# Altium PCB SPECCY2010.PcbDoc (part 1 of 2)
Units mil, origin at the board's own origin, x right, y up, seen from the top; angles counter-clockwise.
Board outline 6692.91 x 4724.41 mil, 2 copper layers (Top Layer, Bottom Layer); 70 components, 123 nets, 541 pads, 228 vias.
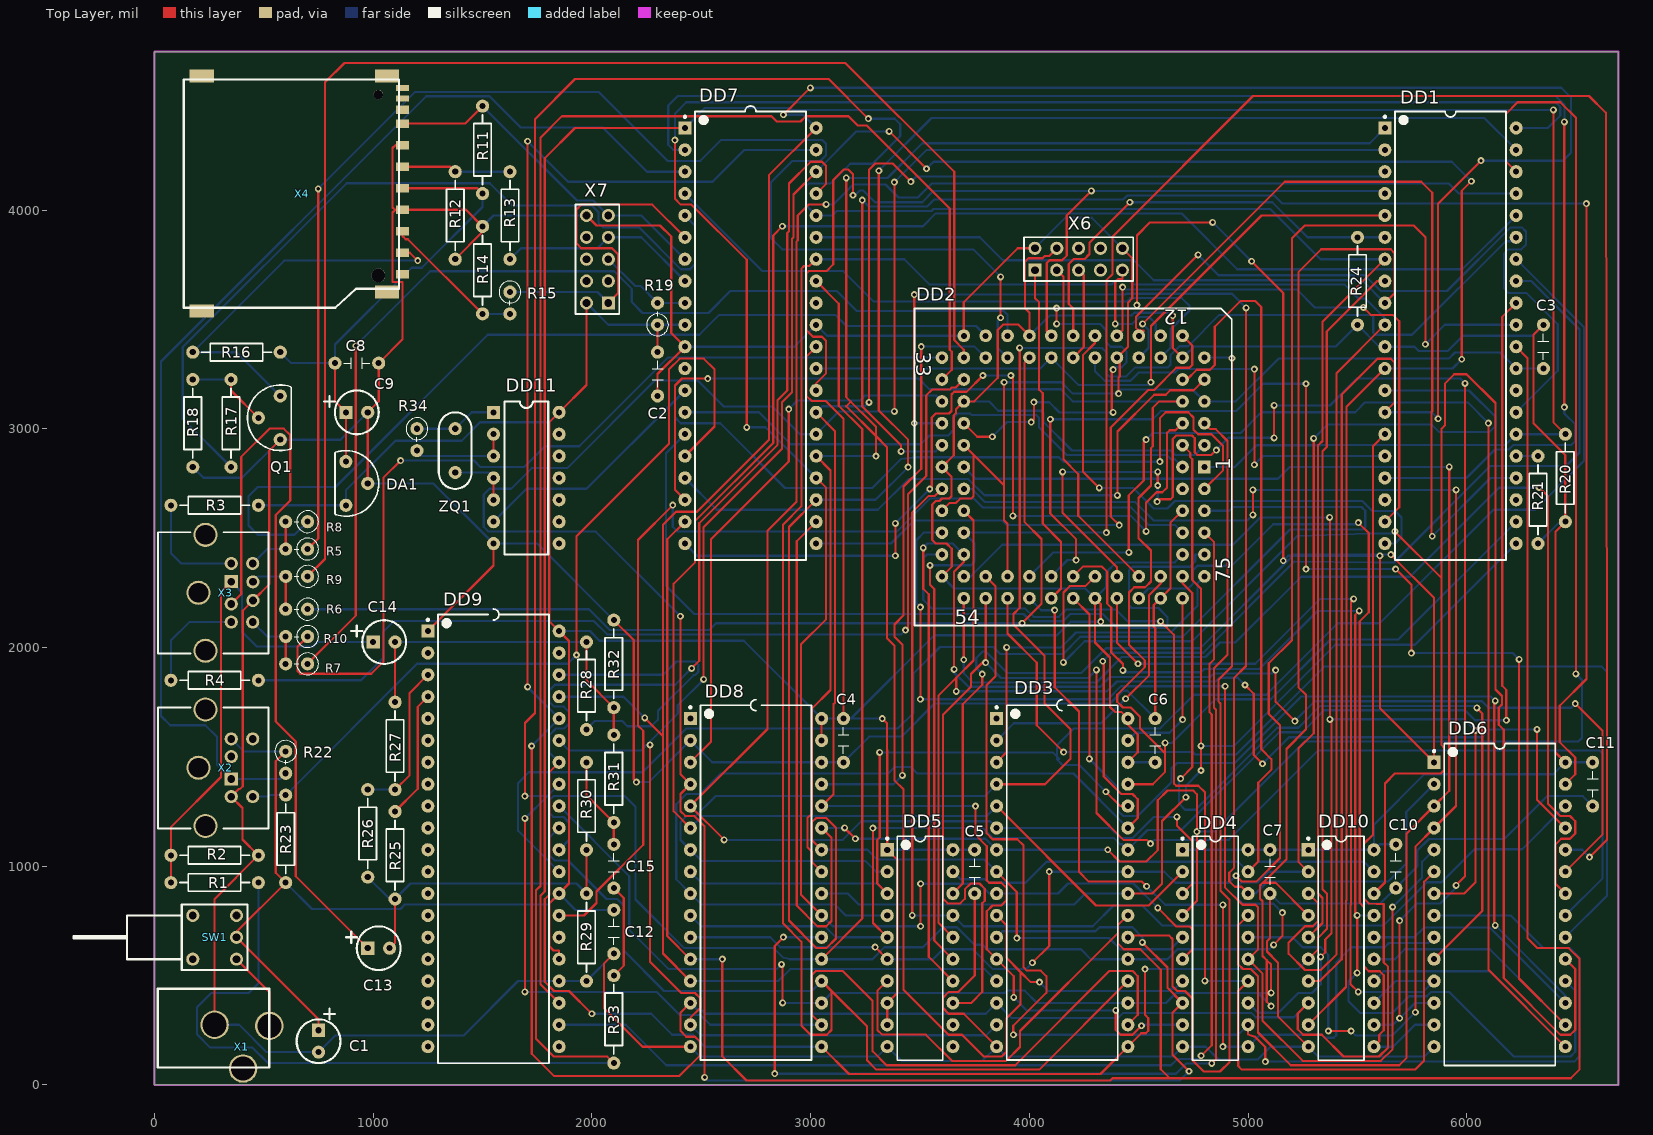
[diagram p0: Top Layer view]
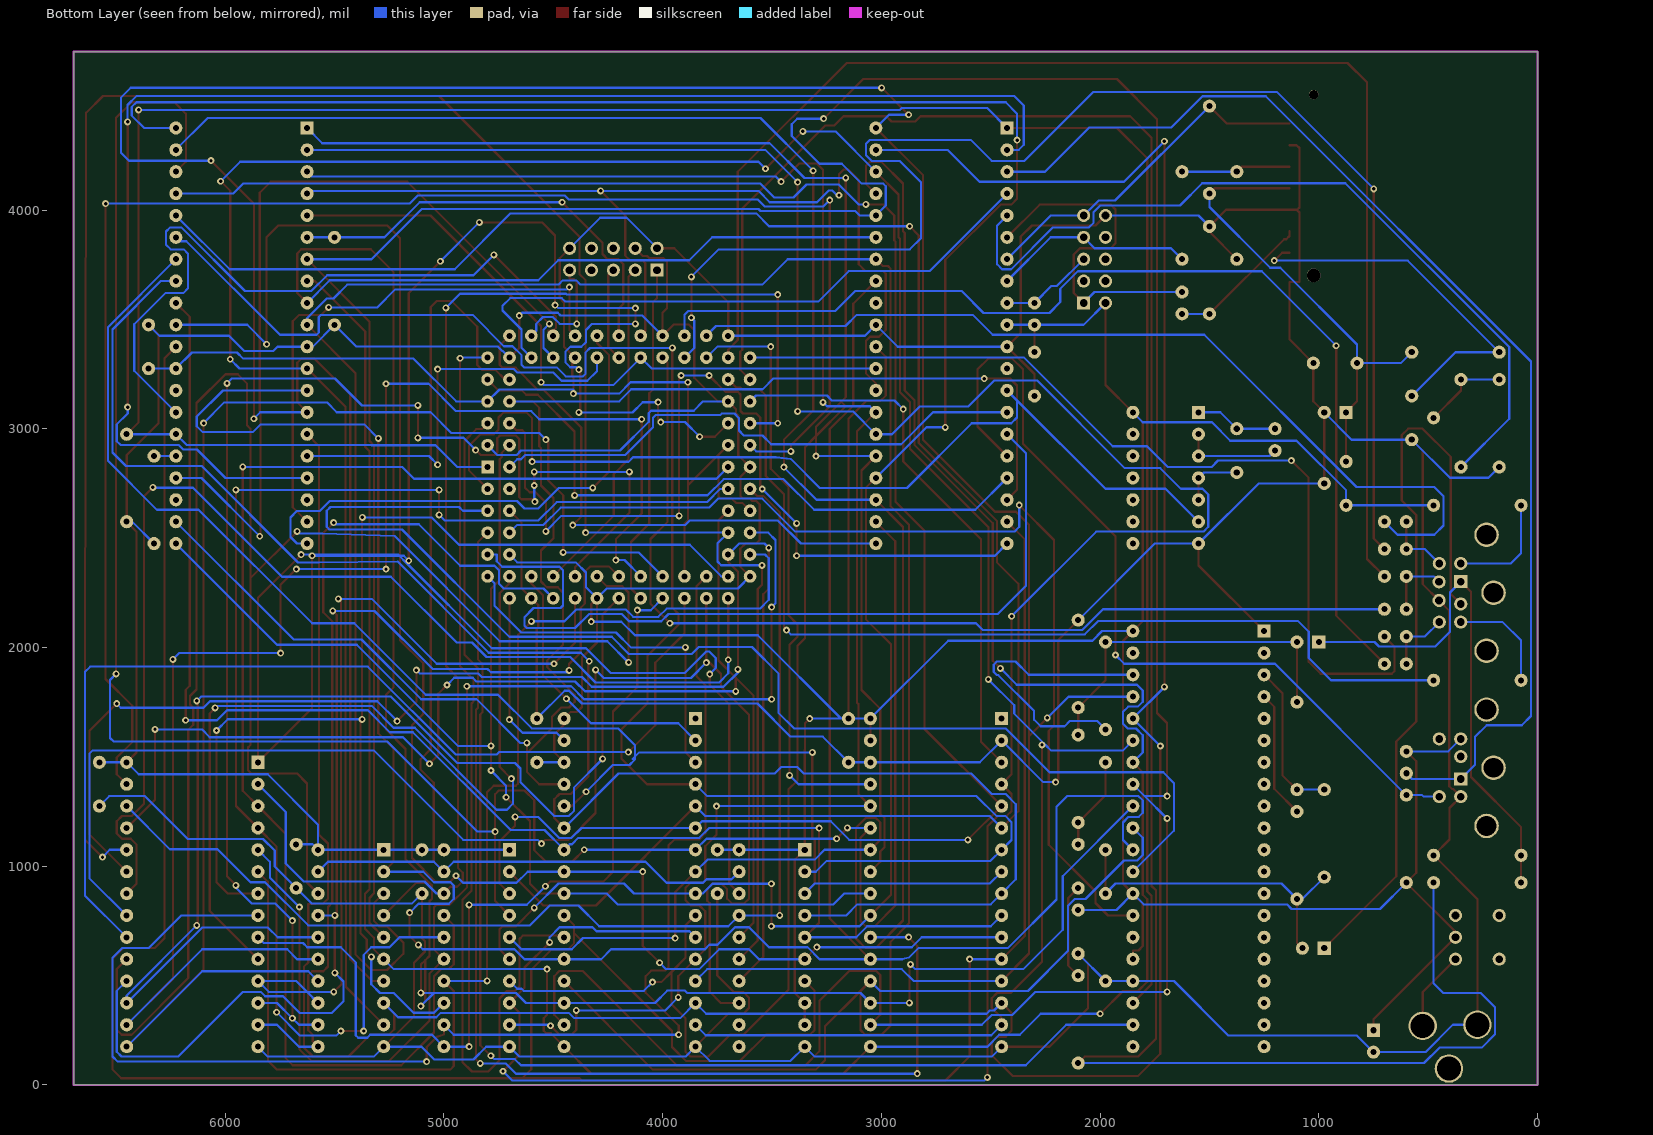
[diagram p1: Bottom Layer view, seen from below]
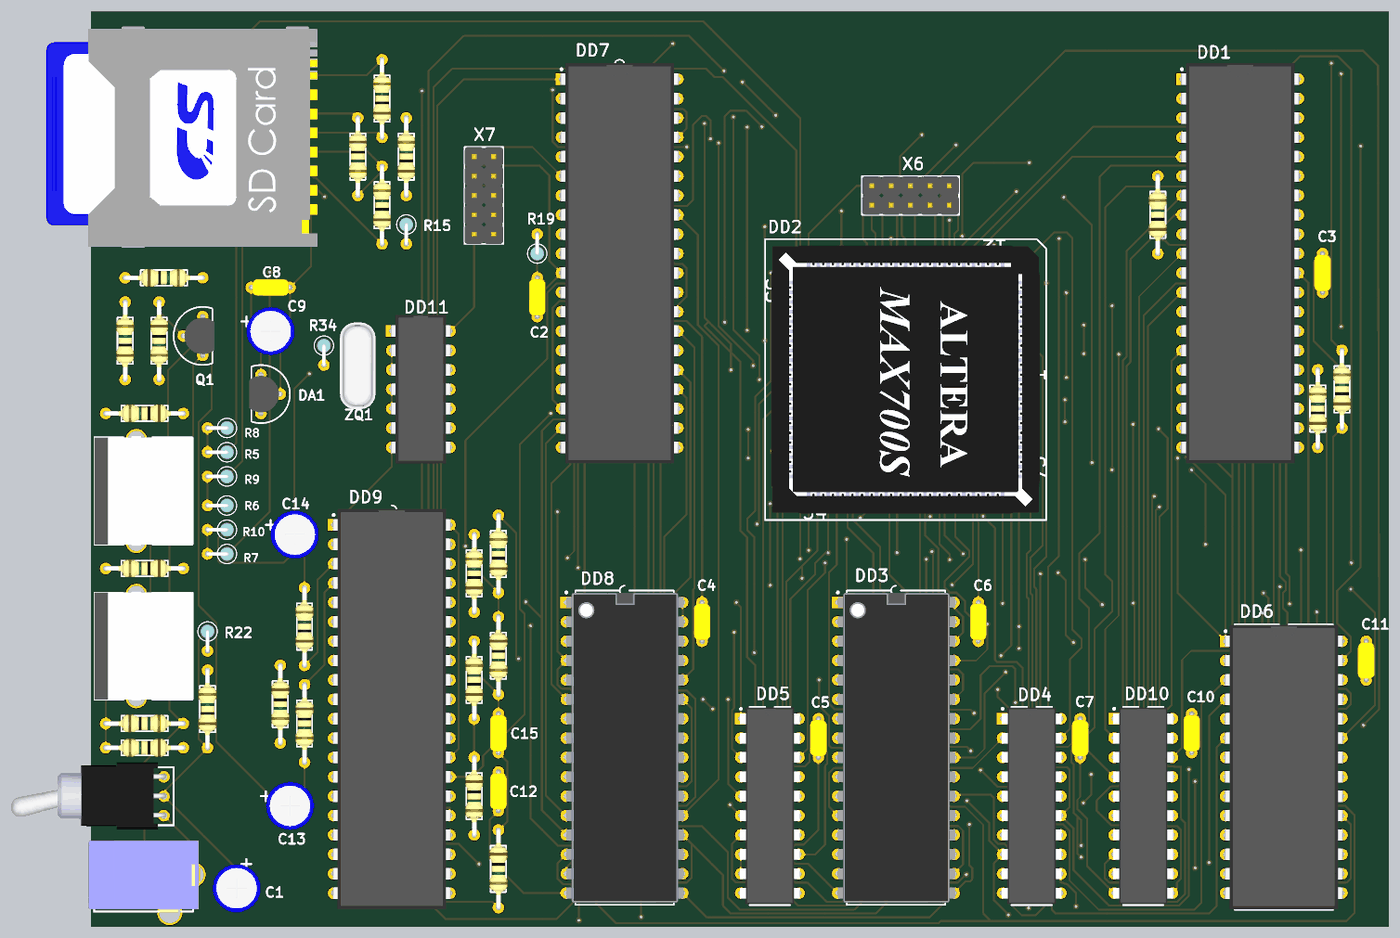
[diagram p3: 3D render of the assembled board from above, using the file's embedded part models]

## Layer stack, top to bottom
Top Layer: signal copper 1.4
Dielectric: dielectric 12.6, FR-4, Dk 4.8
Bottom Layer: signal copper 1.4

## Board outline
0,0 0,4724.41 6692.91,4724.41 6692.91,0 0,0

## Design rules (kind name [scope] priority, off if disabled: settings)
Clearance [All] p1: gap=10
HoleSize [All] p1: absolutevalues=TRUE maxlimit=177.17 minlimit=15.75 maxpercent=80.000 minpercent=20.000
HoleToHoleClearance [All] p1: gap=10 allowstackedmicrovias=FALSE
MinimumSolderMaskSliver [All] p1: minsoldermaskwidth=3.94
PasteMaskExpansion [All] p1: expansion=3.94
PlaneClearance [All] p1: clearance=19.68
PolygonConnect [All] p1: connectstyle=Direct reliefconductorwidth=10 reliefentries=4 polygonreliefangle="90 Angle"
RoomDefinition SPECCY2010 [InComponentClass('SPECCY2010')] p1: confinementstyle=ConfineIn formatcopy=TRUE lockcomponents=FALSE outline -500,5.2 6692.91,5.2 6692.91,4724.41 -500,4724.41
RoutingVias [All] p1: holewidth=15.75 width=31.5 viastyle="Through Hole" minholewidth=15.75 minwidth=31.5 maxholewidth=15.75 maxwidth=31.5
SMDNeckDown [All] p1: percent=50.000
SilkscreenOverComponentPads [All] p1: minsilkscreentomaskgap=10
SolderMaskExpansion [All] p1: expansion=3.94
Width [All] p1: maxlimit=10 minlimit=10 preferedwidth=10
22 further rules are at their usual default settings.

## Components (designator, comment, footprint, x,y, rotation, side; value= is the part's Value field where it differs from the comment)
C1 "47,0" CAPPOL_2.54 750,200 r270 top locked
C2 "0,1" CAP_5.08-7.8x3.2#1 2300,3250 r0 top
C3 "0,1" CAP_5.08-7.8x3.2#1 6350,3375 r0 top
C4 "0,1" CAP_5.08-7.8x3.2#1 3150,1575 r0 top
C5 "0,1" CAP_5.08-7.8x3.2#1 3750,975 r0 top
C6 "0,1" CAP_5.08-7.8x3.2#2 4575,1575 r90 top
C7 "0,1" CAP_5.08-7.8x3.2#2 5100,975 r270 top
C8 "0,1" CAP_5.08-7.8x3.2#2 925,3300 r0 top locked
C9 "47,0" CAPPOL_2.54 925,3075 r0 top locked
C10 "0,1" CAP_5.08-7.8x3.2#2 5675,1000 r270 top
C11 "0,1" CAP_5.08-7.8x3.2#1 6575,1375 r0 top
C12 "0,1" CAP_5.08-7.8x3.2#2 2100,700 r270 top
C13 "1.0" CAPPOL_2.54 1025,625 r0 top
C14 "1.0" CAPPOL_2.54 1050,2025 r0 top
C15 "0.1" CAP_5.08-7.8x3.2#3 2100,1000 r90 top
DA1 "LP2950" TO92 925,2750 r180 top locked
DD1 "Z80A" DIP-40#1 5925,3425 r270 top
DD2 "EPM7128S/PLCC" PLCC84-Socket+AlteraMAX700S 4200,2825 r180 top
DD3 "UT621024" DIP-32/D41.2 4150,925 r180 top
DD4 "74HCT245" DIP-20 4850,625 r270 top
DD5 "74HCT245" DIP-20 3500,625 r270 top
DD6 "UT62256" DIP-28W 6150,825 r270 top
DD7 "ATMEGA16" DIP-40#2 2725,3425 r90 top
DD8 "AT29C020" DIP-32/D41.2 2750,925 r180 top
DD9 "YM2149F" DIP-40#3 1550,1125 r0 top
DD10 "74HCT245" DIP-20 5425,625 r270 top
DD11 "74HC04" DIP-14 1700,2775 r270 top
Q1 "BC557" TO92 525,3050 r0 top locked
R1 "4K7" RES_10.16#1 275,925 r180 top locked
R2 "2K2" RES_10.16#1 275,1050 r0 top locked
R3 "100" RES_10.16#1 275,2650 r180 top locked
R4 "330" RES_10.16#1 275,1850 r180 top locked
R5 "470" RES-2.54 650,2450 r180 top locked
R6 "470" RES-2.54 650,2175 r180 top locked
R7 "470" RES-2.54 650,1925 r180 top locked
R8 "330" RES-2.54 650,2575 r180 top locked
R9 "330" RES-2.54 650,2325 r180 top locked
R10 "330" RES-2.54 650,2050 r180 top locked
R11 "10K" RES_10.16#1 1500,4275 r90 top locked
R12 "2K2" RES_10.16#1 1375,3975 r270 top locked
R13 "1K" RES_10.16#1 1625,3975 r90 top locked
R14 "2K2" RES_10.16#2 1500,3725 r180 top locked
R15 "1K" RES-2.54 1625,3575 r270 top locked
R16 "10K" RES_10.16#1 375,3350 r0 top locked
R17 "2K2" RES_10.16#1 350,3025 r270 top locked
R18 "2K2" RES_10.16#1 175,3025 r90 top locked
R19 "10K" RES-2.54 2300,3525 r90 top
R20 "10K" RES_10.16#2 6450,2775 r180 top
R21 "10K" RES_10.16#1 6325,2675 r90 top
R22 "4K7" RES-2.54 600,1475 r270 top locked
R23 "4K7" RES_10.16#1 600,1125 r90 top locked
R24 "2K2" RES_10.16#2 5500,3675 r180 top
R25 "1K" RES_10.16#2 1100,1050 r0 top
R26 "2K" RES_10.16#2 975,1150 r0 top
R27 "2K" RES_10.16#2 1100,1550 r180 top
R28 "1K" RES_10.16#2 1975,1825 r180 top
R29 "5K1" RES_10.16#2 1975,675 r0 top
R30 "4K7" RES_10.16#3 1975,1275 r0 top
R31 "4K7" RES_10.16#1 2100,1400 r270 top
R32 "5K1" RES_10.16#2 2100,1925 r180 top
R33 "4K7" RES_10.16#1 2100,300 r270 top
R34 "360" RES-2.54 1200,2950 r270 top
SW1 "SW_T_SPDT" SW_T_SPDT 275,675 r180 top locked
X1 "X3" "CONN JACK PWR" 375,175 r180 top locked
X2 "X6" Mini-DIN6 325,1450 r0 top locked
X3 "X8" Mini-DIN8 325,2250 r0 top locked
X4 "X9" "SD Card Socket SDCMF-10901W0T0" 675,4075 r270 top locked
X6 "X10" "Double row pin strip 5 way" 4225,3775 r0 top
X7 "X10" "Double row pin strip 5 way" 2025,3775 r90 top
ZQ1 "14MHz" QUARTZ 1375,2900 r270 top

## Footprints (in the part's own frame and the unit in brackets; to place one, negate y for a bottom-side part, rotate by r counter-clockwise, add the part's x,y. Pads: shape width x height; smd on the part's side, far side on the other; paste and mask are expansions set on the pad)
CAP_5.08-7.8x3.2#1 [mil] "Capacitor, Ceramic, Thru-Hole, Dipped Radial; Body 7.8 x 3.2 mm (WxT) Pin Spacing 5.08 mm (typ)"
  round 60 hole 27.56: 1(0,100) 2(0,-100)
  silkscreen extent -25,-60 25,60, body extent -42,-110 43,110, height 170
CAP_5.08-7.8x3.2#2 [mil] "Capacitor, Ceramic, Thru-Hole, Dipped Radial; Body 7.8 x 3.2 mm (WxT) Pin Spacing 5.08 mm (typ)"
  round 60 hole 27.56: 1(-100,0) 2(100,0)
  silkscreen extent -60,-25 60,25, body extent -110,-42 110,43, height 170
CAP_5.08-7.8x3.2#3 [mil] "Capacitor, Ceramic, Thru-Hole, Dipped Radial; Body 7.8 x 3.2 mm (WxT) Pin Spacing 5.08 mm (typ)"
  round 60 hole 27.56: 1(100,0) 2(-100,0)
  silkscreen extent -60,-25 60,25, body extent -110,-43 110,42, height 170
CAPPOL_2.54 [mil]
  round 60 hole 27.56: MINUS(50,0)
  rect 60x60 hole 27.56: PLUS(-50,0)
  silkscreen extent -150,-100 100,100, body extent -125,-125 125,125, height 454
"CONN JACK PWR" [mm] "Разъем питания (штекер)"
  round 3.3 hole 2.8: 1(2.54,-2.54) 2(-0.762,2.54) 3(-3.81,-2.413)
  silkscreen extent -3.81,-6.73 9.14,2.41, body extent -4.78,-6.86 9.86,2.54, height 3.19
DIP-14 [mil]
  rect 60x60 hole 27.56: 1(-300,-150)
  round 60 hole 27.56: 2(-200,-150) 3(-100,-150) 4(0,-150) 5(100,-150) 6(200,-150) 7(300,-150) 8(300,150) 9(200,150) 10(100,150) 11(0,150) 12(-100,150) 13(-200,150) 14(-300,150)
  silkscreen extent -350,-100 350,100, body extent -384,-155 384,155, height 200
DIP-20 [mil] "DIP, 20-Pin, Row Spacing 7.62 mm, Pitch 2.54 mm"
  rect 60x60 hole 27.56: 1(-450,-150)
  round 60 hole 27.56: 2(-350,-150) 3(-250,-150) 4(-150,-150) 5(-50,-150) 6(50,-150) 7(150,-150) 8(250,-150) 9(350,-150) 10(450,-150) 11(450,150) 12(350,150) 13(250,150) 14(150,150) 15(50,150) 16(-50,150) 17(-150,150) 18(-250,150) 19(-350,150) 20(-450,150)
  silkscreen extent -512,-155 512,104, body extent -507,-155 508,155, height 185
DIP-28W [mil] "DIP, 28-Leads, Row Spacing 15.24mm, Pitch 2.54mm, Body 37x13.3mm, Window"
  rect 60x60 hole 27.56: 1(-650,-300)
  round 60 hole 27.56: 2(-550,-300) 3(-450,-300) 4(-350,-300) 5(-250,-300) 6(-150,-300) 7(-50,-300) 8(50,-300) 9(150,-300) 10(250,-300) 11(350,-300) 12(450,-300) 13(550,-300) 14(650,-300) 15(650,300) 16(550,300) 17(450,300) 18(350,300) 19(250,300) 20(150,300) 21(50,300) 22(-50,300) 23(-150,300) 24(-250,300) 25(-350,300) 26(-450,300) 27(-550,300) 28(-650,300)
  silkscreen extent -736,-305 736,254, body extent -735,-305 735,305, height 225
DIP-32/D41.2 [mil] "DIP, Ceramic, 32-Pin, Row Spacing 15.24 mm, Pitch 2.54 mm"
  rect 60x60 hole 27.56: 1(300,-750)
  round 60 hole 27.56: 2(300,-650) 3(300,-550) 4(300,-450) 5(300,-350) 6(300,-250) 7(300,-150) 8(300,-50) 9(300,50) 10(300,150) 11(300,250) 12(300,350) 13(300,450) 14(300,550) 15(300,650) 16(300,750) 17(-300,750) 18(-300,650) 19(-300,550) 20(-300,450) 21(-300,350) 22(-300,250) 23(-300,150) 24(-300,50) 25(-300,-50) 26(-300,-150) 27(-300,-250) 28(-300,-350) 29(-300,-450) 30(-300,-550) 31(-300,-650) 32(-300,-750)
  silkscreen extent -254,-836 305,811, body extent -305,-800 300,800, height 240
DIP-40#1 [mil] "DIP, 40-Pin, Row Spacing 15.24 mm, Pitch 2.54 mm"
  rect 60x60 hole 27.56: 1(-950,-300)
  round 60 hole 27.56: 2(-850,-300) 3(-750,-300) 4(-650,-300) 5(-550,-300) 6(-450,-300) 7(-350,-300) 8(-250,-300) 9(-150,-300) 10(-50,-300) 11(50,-300) 12(150,-300) 13(250,-300) 14(350,-300) 15(450,-300) 16(550,-300) 17(650,-300) 18(750,-300) 19(850,-300) 20(950,-300) 21(950,300) 22(850,300) 23(750,300) 24(650,300) 25(550,300) 26(450,300) 27(350,300) 28(250,300) 29(150,300) 30(50,300) 31(-50,300) 32(-150,300) 33(-250,300) 34(-350,300) 35(-450,300) 36(-550,300) 37(-650,300) 38(-750,300) 39(-850,300) 40(-950,300)
  silkscreen extent -1026,-305 1026,254, body extent -1032,-305 1032,305, height 224
DIP-40#2 [mil] "DIP, 40-Pin, Row Spacing 15.24 mm, Pitch 2.54 mm"
  rect 60x60 hole 27.56: 1(950,300)
  round 60 hole 27.56: 2(850,300) 3(750,300) 4(650,300) 5(550,300) 6(450,300) 7(350,300) 8(250,300) 9(150,300) 10(50,300) 11(-50,300) 12(-150,300) 13(-250,300) 14(-350,300) 15(-450,300) 16(-550,300) 17(-650,300) 18(-750,300) 19(-850,300) 20(-950,300) 21(-950,-300) 22(-850,-300) 23(-750,-300) 24(-650,-300) 25(-550,-300) 26(-450,-300) 27(-350,-300) 28(-250,-300) 29(-150,-300) 30(-50,-300) 31(50,-300) 32(150,-300) 33(250,-300) 34(350,-300) 35(450,-300) 36(550,-300) 37(650,-300) 38(750,-300) 39(850,-300) 40(950,-300)
  silkscreen extent -1026,-254 1051,305, body extent -1032,-305 1032,305, height 224
DIP-40#3 [mil] "DIP, 40-Pin, Row Spacing 15.24 mm, Pitch 2.54 mm"
  rect 60x60 hole 27.56: 1(-300,950)
  round 60 hole 27.56: 2(-300,850) 3(-300,750) 4(-300,650) 5(-300,550) 6(-300,450) 7(-300,350) 8(-300,250) 9(-300,150) 10(-300,50) 11(-300,-50) 12(-300,-150) 13(-300,-250) 14(-300,-350) 15(-300,-450) 16(-300,-550) 17(-300,-650) 18(-300,-750) 19(-300,-850) 20(-300,-950) 21(300,-950) 22(300,-850) 23(300,-750) 24(300,-650) 25(300,-550) 26(300,-450) 27(300,-350) 28(300,-250) 29(300,-150) 30(300,-50) 31(300,50) 32(300,150) 33(300,250) 34(300,350) 35(300,450) 36(300,550) 37(300,650) 38(300,750) 39(300,850) 40(300,950)
  silkscreen extent -305,-1026 254,1051, body extent -305,-1032 305,1032, height 224
"Double row pin strip 5 way" [mil] "Гребенка на 10 контактов"
  rect 60x60 hole 35.43: 1(-200,-50)
  round 60 hole 35.43: 2(-200,50) 3(-100,-50) 4(-100,50) 5(0,-50) 6(0,50) 7(100,-50) 8(100,50) 9(200,-50) 10(200,50)
  silkscreen extent -250,-100 250,100, body extent -250,-100 250,100, height 398
Mini-DIN6 [mil] "Штекер Mini-DIN 6 pin"
  rect 60x60 hole 35.43: 1(26,-51)
  round 60 hole 35.43: 2(26,51) 3(26,-132) 4(26,132) 5(124,-132) 6(124,132)
  round 110.24 / inner round 60 / far side round 112 hole 90.55: M1(-92,-266) M2(-124,0) M3(-92,266)
  silkscreen extent -309,-278 196,276, body extent -309,-282 203,282, height 518
Mini-DIN8 [mil] "Разъем Mini-DIN 8 pin"
  rect 60x60 hole 35.43: 1(26,51)
  round 60 hole 35.43: 2(26,-51) 3(26,134) 4(125,-35) 5(26,-134) 6(124,134) 7(125,50) 8(124,-134)
  round 110.24 / inner round 60 / far side round 112 hole 90.55: M1(-92,-265) M2(-124,0) M3(-92,265)
  silkscreen extent -309,-277 196,277, body extent -309,-282 203,282, height 518
PLCC84-Socket+AlteraMAX700S [mil] "Панелька для PLCC84"
  rect 58x58 hole 27.56: 1(-600,0)
  round 58 hole 27.56: 2(-500,0) 3(-600,-100) 4(-500,-100) 5(-600,-200) 6(-500,-200) 7(-600,-300) 8(-500,-300) 9(-600,-400) 10(-500,-400) 11(-600,-500) 12(-500,-600) 13(-500,-500) 14(-400,-600) 15(-400,-500) 16(-300,-600) 17(-300,-500) 18(-200,-600) 19(-200,-500) 20(-100,-600) 21(-100,-500) 22(0,-600) 23(0,-500) 24(100,-600) 25(100,-500) 26(200,-600) 27(200,-500) 28(300,-600) 29(300,-500) 30(400,-600) 31(400,-500) 32(500,-600) 33(600,-500) 34(500,-500) 35(600,-400) 36(500,-400) 37(600,-300) 38(500,-300) 39(600,-200) 40(500,-200) 41(600,-100) 42(500,-100) 43(600,0) 44(500,0) 45(600,100) 46(500,100) 47(600,200) 48(500,200) 49(600,300) 50(500,300) 51(600,400) 52(500,400) 53(600,500) 54(500,600) 55(500,500) 56(400,600) 57(400,500) 58(300,600) 59(300,500) 60(200,600) 61(200,500) 62(100,600) 63(100,500) 64(0,600) 65(0,500) 66(-100,600) 67(-100,500) 68(-200,600) 69(-200,500) 70(-300,600) 71(-300,500) 72(-400,600) 73(-400,500) 74(-500,600) 75(-600,500) 76(-500,500) 77(-600,400) 78(-500,400) 79(-600,300) 80(-500,300) 81(-600,200) 82(-500,200) 83(-600,100) 84(-500,100)
  silkscreen extent -725,-725 725,725, body extent -692,-692 692,692, height 349
QUARTZ [mil] "Кварц"
  round 60 hole 27.56: 1(-100,0) 2(100,0)
  silkscreen extent -175,-75 175,75, body extent -219,-92 227,91, height 138
RES-2.54 [mil] "Резистор вертикально"
  round 60 hole 27.56: 1(-50,0) 2(50,0)
  silkscreen extent -100,-50 10,50, body extent -86,-36 60,36, height 287
RES_10.16#1 [mil] "Резистор, Thru-Hole; 2 Leads; 0.4 in Pin Spacing"
  round 60 hole 27.56: 1(-200,0) 2(200,0)
  silkscreen extent -160,-40 160,40, body extent -212,-45 212,46, height 116
RES_10.16#2 [mil] "Резистор, Thru-Hole; 2 Leads; 0.4 in Pin Spacing"
  round 60 hole 27.56: 1(0,200) 2(0,-200)
  silkscreen extent -40,-160 40,160, body extent -45,-212 46,212, height 116
RES_10.16#3 [mil] "Резистор, Thru-Hole; 2 Leads; 0.4 in Pin Spacing"
  round 60 hole 27.56: 1(0,-200) 2(0,200)
  silkscreen extent -40,-160 40,160, body extent -46,-212 45,212, height 116
"SD Card Socket SDCMF-10901W0T0" [mm] "Разъем SD карточки"
  rect 1.5x2.8 smd: 0(-13.65,9.85) 0(-13.65,-11.65) 0(11.45,9.85) 0(13.65,-11.65)
  round 1.1 hole 1.1 unplated: 0(-11.5,8.85)
  round 1.6 hole 1.6 unplated: 0(9.5,8.85)
  rect 1x1.5 smd: 1(6.875,11.65) 2(4.375,11.65) 3(1.875,11.65) 4(-0.625,11.65) 5(-3.125,11.65) 6(-5.625,11.65) 7(-8.125,11.65) 8(-9.75,11.65) 9(9.375,11.65)
  rect 0.7x1.5 smd: 10(-11.05,11.65) 11(-12.25,11.65)
  silkscreen extent -13.25,-13.75 13.25,11.25, body extent -14.24,-23 14.36,12.5, height 3
SW_T_SPDT [mil] "Кнопка питания на плату"
  round 60 hole 35.43: 1(-100,100) 2(-100,0) 3(-100,-100) 4(100,-100) 5(100,100)
  silkscreen extent -150,-150 645,150, body extent -111,-175 688,171, height 288
TO92 [mil] "TO, Flat Index; 3 In-Line, Axial Leads; Body Dia. 4.8mm; Leads 0.48 x 0.5 mm (max)"
  round 60 hole 27.56: 1(50,-100) 2(-50,0) 3(50,100)
  silkscreen extent -100,-150 100,150, body extent -61,-110 110,110, height 315

## Part data
C1 C9 C13 C14: library part "C POL"
C2 C3 C4 C5 C6 C7 C8 C10 C11 C12 C15: library part C
DD6: library part CY62256_Syd's
DD11: "Hex Inverter"
Q1: library part "TRANS NPN"
R1 R2 R3 R4 R5 R6 R7 R8 R9 R10 R11 R12 R13 R14 R15 R16 R17 R18 R19 R20 R21 R22 R23 R24 R25 R26 R27 R28 R29 R30 R31 R32 R33 R34: library part R
X4: "SD Card socket"
ZQ1: library part QUARTZ, "QUARTZ"

## Via types
v1: diameter 31.5, hole 15.75, Top Layer to Bottom Layer, tented both sides, 228 vias

## Nets (pads, with @x,y where several pads share a name; then routed paths per layer and width w, separated by ;. In a path a pad name is that pad's centre, name@x,y a point inside that pad or via, vN(x,y) a via of type N, cw(c..) or ccw(c..) an arc to the next point about the centre after c; other vN are vias at no path point)
A0: DD1.30 DD3.23 DD5.7 DD7.19 DD8.12 | length 14619.9
  Top Layer w10: DD7.19@2425,2575 2344.5,2494.5 2344.5,680.5 DD8.12@2450,575 ; v1(2595.99,575) 2595.99,131 2706.5,20.5 4369.5,20.5 4379.5,30.5 4641.5,30.5 ; DD5.7@3350,475 3305,430 3305,251.5 3326.5,230 3526.5,230 3646.5,110 3893.5,110 3957.24,173.74 3957.24,246.24 4404.5,693.5 ; DD3.23@4450,775 4404.5,729.5 ; DD1.30@6225,3375 6276.5,3323.5 6276.5,671.5 6322.5,625.5 6465.5,625.5 6515.5,575.5 6515.5,71.5 6474.5,30.5 ; 4404.5,693.5 4404.5,729.5 ; 4404.5,693.5 4404.5,647.5 4431.5,620.5 4506.5,620.5 4600.5,526.5 4600.5,71.5 4641.5,30.5 ; 4404.5,693.5 4404.5,729.5 ; 4641.5,30.5 6474.5,30.5 ; 4641.5,30.5 6474.5,30.5
  Bottom Layer w10: DD8.12@2450,575 v1(2595.99,575)
A1: DD1.31 DD3.25 DD5.6 DD8.11 | length 7763.4
  Top Layer w10: v1(3294.5,630.5) DD5.6@3350,575 ; v1(4013.5,558.5) 4090.5,635.5 v1(4090.5,975) ; v1(4944.5,956.5) 4971.5,929.5 5037.5,929.5 5145.5,1037.5 5145.5,1644.5 5094.5,1695.5 5094.5,1927.5 5200.5,2033.5 5200.5,3871.5 5258.5,3929.5 5756.5,3929.5 5810.5,3875.5 v1(5810.5,3386.5)
  Bottom Layer w10: DD8.11@2450,675 2814.99,675 2860.5,629.5 3293.5,629.5 v1(3294.5,630.5) ; DD5.6@3350,575 3559,575 3604.5,620.5 3740.86,620.5 3831.86,529.5 3984.5,529.5 v1(4013.5,558.5) ; v1(4090.5,975) DD3.25@4450,975 4616.99,975 4667.5,924.5 4912.5,924.5 v1(4944.5,956.5) ; v1(5810.5,3386.5) 5899,3475 DD1.31@6225,3475
A2: DD1.32 DD3.26 DD5.5 DD8.10 | length 6629.9
  Top Layer w10: v1(3284.5,1174.5) 3284.5,740.5 DD5.5@3350,675 ; v1(6180.24,1667.31) 6180.24,1806.15 6161.5,1824.9 6161.5,3511.5 DD1.32@6225,3575
  Bottom Layer w10: DD8.10@2450,775 2499.5,725.5 3064.5,725.5 3114.99,675 DD5.5@3350,675 ; v1(3284.5,1174.5) 3786.86,1174.5 3831.86,1129.5 4385,1129.5 4413.78,1100.71 4424.29,1100.71 DD3.26@4450,1075 4540.24,1165.24 4694.33,1165.24 5141.83,1612.75 5246.7,1612.75 5346.83,1712.87 5991.44,1712.87 6037,1667.31 v1(6180.24,1667.31)
A3: DD1.33 DD3.27 DD5.4 DD8.9 | length 8026
  Top Layer w10: v1(4335.5,1937.24) 4340.24,1932.5 4340.24,1409.75 4419.99,1330 4471.5,1330 4495.5,1306 4495.5,1220.5 DD3.27@4450,1175
  Bottom Layer w10: DD5.4@3350,775 3159.99,775 3109.5,825.5 2499.5,825.5 DD8.9@2450,875 2385,940 2385,1283.5 2431.5,1330 2495.5,1330 2589.21,1423.72 3355.21,1423.72 3384.78,1453.28 3457.24,1453.28 3486.81,1423.72 4201.28,1423.72 DD3.27@4450,1175 ; v1(4335.5,1937.24) 4374.5,1976.24 4794.75,1976.24 5212,2393.5 5571.24,2388.5 5666.5,2388.5 6107.5,2829.5 6453.5,2829.5 6515,2891 6515,3453.71 6293.71,3675 DD1.33@6225,3675
A4: DD1.34 DD3.28 DD5.3 DD8.8 | length 6959.3
  Top Layer w10: v1(3315.5,1520.5) 3315.5,1131.5 3304.5,1120.5 3304.5,920.5 DD5.3@3350,875 ; v1(4349.5,1340.5) 4414.99,1275 DD3.28@4450,1275
  Bottom Layer w10: DD8.8@2450,975 2504.5,920.5 3304.5,920.5 DD5.3@3350,875 ; v1(3315.5,1520.5) 4107.08,1520.5 4125.5,1502.08 ; v1(4349.5,1340.5) 4227.5,1462.5 4151.5,1462.5 ; DD1.34@6225,3775 6535.5,3464.5 6535.5,2853.53 6311.96,2630 6121.32,2630 5601.82,2110.5 5409.43,2110.5 5082.43,1783.5 4752,1783.5 4598.5,1630 4204,1630 4125.5,1551.5 4125.5,1502.08 ; 4125.5,1502.08 4136.83,1490.75 4130.04,1483.95 ; 4125.5,1502.08 4125.5,1488.5 4130.04,1483.95 ; 4130.04,1483.95 4151.5,1462.5 ; 4130.04,1483.95 4151.5,1462.5
A5: DD1.35 DD3.4 DD5.2 DD8.7 | length 7783.3
  Top Layer w10: DD3.4@3850,1375 4071.49,1375 4187.5,1491 4187.5,1626.5 4068.77,1745.23 4068.77,1962.48 3927.5,2103.75 3927.5,2152.99 3955.5,2180.99 v1(3955.5,3369.5)
  Bottom Layer w10: DD5.2@3350,975 3299.5,975 3250,1024.5 2500.5,1024.5 DD8.7@2450,1075 2405,1120 2405,1201 2434,1230 2474,1230 2564.5,1320.5 3795.5,1320.5 DD3.4@3850,1375 ; v1(3955.5,3369.5) 4331.5,3369.5 4351.75,3349.24 4351.75,3251.5 4363.74,3239.5 4442.5,3239.5 4483.5,3280.5 4633.5,3280.5 4644.5,3291.5 4644.5,3335.5 4686.5,3377.5 4725.5,3377.5 4868.5,3520.5 5561.5,3520.5 5571.5,3510.5 5571.5,3439.5 5581.5,3429.5 5749.5,3429.5 6177.5,3857.5 6225,3857.5 DD1.35@6225,3875
A6: DD1.36 DD3.5 DD4.2 DD8.6 | length 9118
  Top Layer w10: DD8.6@2450,1175 2373.5,1251.5 2373.5,2291 2470.5,2388 2470.5,2576.5 2828.75,2934.75 2828.75,3883.75 v1(2870.5,3925.5) ; DD3.5@3850,1275 4304.5,820.5 4545.5,820.5 DD4.2@4700,975
  Bottom Layer w10: DD8.6@2450,1175 2504.5,1229.5 3804.5,1229.5 DD3.5@3850,1275 ; v1(2870.5,3925.5) 3513.24,3925.5 3572.24,3984.5 4695.5,3984.5 4950.5,3729.5 5979.5,3729.5 DD1.36@6225,3975
A7: DD1.37 DD3.6 DD4.3 DD8.5 | length 9109.1
  Top Layer w10: v1(2604.5,1120.5) DD8.5@2450,1275 2802.5,1627.5 2802.5,2533.16 2934.5,2665.16 2934.5,3854.75 2941.24,3861.5 2941.24,3975.24 2991.5,4025.5 v1(3070.5,4025.5) ; v1(4674.5,1225.5) 4674.5,1185.5 4745,1114.99 4745,920 DD4.3@4700,875
  Bottom Layer w10: v1(2604.5,1120.5) 3146.5,1120.5 3231.5,1205.5 3819.5,1205.5 DD3.6@3850,1175 4370.99,1175 4416.5,1129.5 4473.86,1129.5 4569.86,1225.5 v1(4674.5,1225.5) ; v1(3070.5,4025.5) 3103.75,4025.5 3194.5,4116.24 3342,4116.24 3401.5,4056.75 3488.91,4056.75 3552.66,4120.5 5918.15,4120.5 5963.65,4075 DD1.37@6225,4075
A8: DD1.38 DD3.7 DD4.4 DD7.22 DD8.27 | length 10838
  Top Layer w10: DD7.22@3025,2575 2935.9,2485.9 2935.9,820.09 3030.5,725.5 3071.5,725.5 3095.5,749.5 3095.5,1129.5 DD8.27@3050,1175 ; v1(3154.99,1175) v1(3204.5,1125.5) ; v1(4357.99,1075) 4411.5,1021.5 4534.44,1021.5 4586.44,1073.5 4586.44,1301.44 4631.5,1346.5 4748.5,1346.5 4765.5,1329.5 v1(4765.5,1158.5) ; DD4.4@4700,775 4765.5,840.5 ; DD1.38@6225,4175 6179.5,4220.5 6179.5,4440.5 6231.5,4492.5 6427.5,4492.5 6498.5,4421.5 v1(6498.5,1879.5) ; 4765.5,840.5 v1(4765.5,1158.5) ; 4765.5,840.5 v1(4765.5,1158.5)
  Bottom Layer w10: DD8.27@3050,1175 v1(3154.99,1175) ; v1(3204.5,1125.5) 3799.5,1125.5 DD3.7@3850,1075 v1(4357.99,1075) ; v1(4765.5,1158.5) 4847.42,1158.5 5258.67,1569.75 6509.75,1569.75 6526.5,1586.5 6526.5,1851.5 v1(6498.5,1879.5)
A9: DD1.39 DD3.8 DD4.5 DD7.23 DD8.26 | length 9999.6
  Top Layer w10: DD7.23@3025,2675 2900.5,2550.5 2900.5,751.99 3026.99,625.5 3071.5,625.5 3115.5,669.5 3115.5,1176.5 3071.5,1220.5 3025,1220.5 3005,1200.5 3005,1120 DD8.26@3050,1075 ; v1(3311.5,4179.5) 3311.5,3083.24 3445.5,2949.24 v1(3445.5,2824.5) ; DD3.8@3850,975 3942.5,882.5 v1(3942.5,671.5)
  Bottom Layer w10: DD7.23@3025,2675 3296,2675 v1(3445.5,2824.5) ; DD8.26@3050,1075 3259.5,1075 3304.5,1030 3795,1030 DD3.8@3850,975 ; v1(3311.5,4179.5) 3552.5,4420.5 6079.5,4420.5 DD1.39@6225,4275 ; v1(3942.5,671.5) 4364,671.5 4415.32,620.18 4645.18,620.18 DD4.5@4700,675
A10: DD1.40 DD3.9 DD4.6 DD7.24 DD8.23 | length 10649.3
  Top Layer w10: v1(2379.5,4319.5) 2379.5,4051.5 2406.5,4024.5 2455.5,4024.5 2707.5,3772.5 v1(2707.5,3006.5) ; DD7.24@3025,2775 3070.5,2729.5 3070.5,2129.5 2955.9,2014.9 2955.9,869.1 DD8.23@3050,775 ; v1(3502.5,725.5) v1(3502.5,920) ; v1(4586.5,809.5) 4671.5,724.5 4732.5,724.5 4745.5,711.5 4745.5,620.5 DD4.6@4700,575
  Bottom Layer w10: v1(2379.5,4319.5) 2379.5,4440.5 2431.5,4492.5 6405.5,4492.5 6426.5,4471.5 6426.5,4431.5 6370,4375 DD1.40@6225,4375 ; v1(2707.5,3006.5) 2793.5,3006.5 DD7.24@3025,2775 ; DD8.23@3050,775 3099.5,725.5 v1(3502.5,725.5) ; v1(3502.5,920) 3771.5,920 3816.5,875 DD3.9@3850,875 4131,875 4176.5,920.5 4475.5,920.5 v1(4586.5,809.5)
A11: DD1.1 DD3.10 DD4.7 DD7.25 DD8.25 | length 11178.8
  Top Layer w10: DD7.25@3025,2875 3090.5,2809.5 3090.5,1805.99 3005,1720.5 3005,1240 2985,1220 2985,1087.5 3005,1067.5 3005,1020 DD8.25@3050,975 ; v1(3162.5,4146.5) 3162.5,3144.5 ; v1(3298.5,2875) 3298.5,2966.64 ; DD3.10@3850,775 3895,730 3895,580.99 ; v1(4045.99,470) 4005.99,470 3959.5,516.5 ; 3162.5,3144.5 3298.5,3008.5 3298.5,2966.64 ; 3162.5,3144.5 3183.43,3123.57 3162.5,3102.64 3298.5,2966.64 ; 3298.5,2966.64 3348.28,2916.86 3348.28,2043.22 3382.5,2009 3382.5,1393.5 3424.5,1351.5 3424.5,435.5 3630.5,229.5 3691.5,229.5 3790.99,130 3873.5,130 3895,151.5 3895,304.99 3959.5,369.49 3959.5,516.5 ; 3895,580.99 3959.5,516.5 ; 3895,580.99 3959.5,516.5
  Bottom Layer w10: DD7.25@3025,2875 v1(3298.5,2875) ; v1(3162.5,4146.5) 3351.5,4146.5 3510.5,4305.5 5555.5,4305.5 DD1.1@5625,4375 ; v1(4045.99,470) 4085.99,430 4635,430 4645,440 4665,440 DD4.7@4700,475
A12: DD1.2 DD3.11 DD4.8 DD7.26 DD8.4 | length 12701.9
  Top Layer w10: v1(2404.5,2142.5) 2404.5,1420.5 DD8.4@2450,1375 2405,1330 2405,1251.5 2426.5,1230 2466.71,1230 2515,1181.71 v1(2515,34.39) ; v1(3382.5,3079.5) v1(3382.5,4127.5) ; v1(4516.5,651.5) 4631.29,536.7 4631.29,443.71 DD4.8@4700,375 4654.5,329.5 4654.5,137.5 v1(4729.5,62.5)
  Bottom Layer w10: v1(2404.5,2142.5) 2017.5,2529.5 1527,2529.5 1505,2551.5 1505,2699 1531.5,2725.5 1630.5,2725.5 1725,2820 1887,2820 2287.5,3220.5 2483.5,3220.5 2602.5,3101.5 2824.5,3101.5 2950.99,2975 DD7.26@3025,2975 3129.5,3079.5 v1(3382.5,3079.5) ; v1(2515,34.39) 2529.1,20.3 4687.3,20.3 v1(4729.5,62.5) ; v1(3382.5,4127.5) 3530,4275 DD1.2@5625,4275 ; DD3.11@3850,675 3877.24,702.24 4302.24,702.24 4320.5,720.5 4471.5,720.5 4516.5,675.5 v1(4516.5,651.5)
A13: DD1.3 DD3.12 DD4.9 DD7.27 DD8.28 | length 8302
  Top Layer w10: DD7.27@3025,3075 3110.5,2989.5 3110.5,1747.5 3104.5,1741.5 3104.5,1329.5 DD8.28@3050,1275 ; v1(3266.5,3120.5) 3266.5,4184.5 3294.5,4212.5 3375.5,4212.5 v1(3458.33,4129.67) ; v1(3753.5,1275) 3753.5,1143.22 3805,1091.71 3805,935.99 3816.5,924.5 3871.5,924.5 3895,900.99 3895,844 3871.5,820.5 3831.5,820.5 3805,794 3805,620 DD3.12@3850,575 3928.5,496.5 v1(3928.5,400.5) ; v1(4394.5,340.5) 4394.5,251.5 4416.5,229.5 4471.5,229.5 v1(4512.5,270.5)
  Bottom Layer w10: DD7.27@3025,3075 3052.5,3102.5 3248.5,3102.5 v1(3266.5,3120.5) ; DD8.28@3050,1275 v1(3753.5,1275) ; v1(3458.33,4129.67) 3482.16,4153.5 5603.5,4153.5 DD1.3@5625,4175 ; v1(3928.5,400.5) 3988.5,340.5 v1(4394.5,340.5) ; v1(4512.5,270.5) 4517,275 DD4.9@4700,275
A14: DD1.4 DD2.24 DD7.28 | length 5963.7
  Top Layer w10: DD7.28@3025,3175 3025,3207.5 3070.5,3252.99 3070.5,3401.5 3051.5,3420.5 3010.5,3420.5 2979.5,3451.5 2979.5,3708.5 2991.5,3720.5 3072.5,3720.5 3103.5,3751.5 3103.5,4137.5 3151.5,4185.5 3171.5,4185.5 3193.5,4163.5 v1(3193.5,4067.5) ; DD2.24@4100,3425 4079.5,3445.5 4079.5,3758 4091.5,3770 4149,3770 4170.5,3791.5 4170.5,3974.5 v1(4283.5,4087.5)
  Bottom Layer w10: v1(3193.5,4067.5) 3202.5,4067.5 3223.5,4088.5 3241.5,4088.5 3294.24,4035.75 3509.75,4035.75 3561.5,4087.5 v1(4283.5,4087.5) ; DD1.4@5625,4075 DD1.4@5612.5,4087.5 ; v1(4283.5,4087.5) DD1.4@5612.5,4087.5 ; v1(4283.5,4087.5) DD1.4@5612.5,4087.5
A15: DD1.5 DD2.25 DD7.29 | length 3144.5
  Top Layer w10: v1(4555.5,3212.5) 4555.5,3469.5 5061,3975 DD1.5@5625,3975
  Bottom Layer w10: DD7.29@3025,3275 4050,3275 DD2.25@4100,3325 4225.5,3199.5 4542.5,3199.5 v1(4555.5,3212.5)
AVR_INT: DD2.9 DD7.17 | length 2914.3
  Top Layer w10: v1(4402.5,2695.5) 4402.5,2987.5 4570.75,3155.75 4623.24,3155.75 4643.24,3175.75 4750.75,3175.75 DD2.9@4800,3225
  Bottom Layer w10: DD7.17@2425,2775 2570.5,2629.5 3307.28,2629.5 3447.28,2769.5 3720.5,2769.5 3794.5,2695.5 v1(4402.5,2695.5)
AVR_NOINT: DD2.6 DD7.20 | length 4050.9
  Top Layer w10: v1(3387.5,2419.5) v1(3387.5,2567.5) ; v1(3544.5,2724.5) 3553.5,2733.5 3553.5,3051.5 3571.5,3069.5 3632,3069.5 3644,3081.5 3644,3156.5 3656.5,3169 3713,3169 v1(3787.5,3243.5) ; v1(3915.5,3243.5) 3924.5,3234.5 v1(3924.5,2601.5) ; v1(4533.65,2530.5) 4533.65,2662.4 4581,2709.75 4607.75,2709.75 4629.5,2731.5 4629.5,2981.5 4641.11,2993.11 4668.11,2993.11 DD2.6@4700,3025
  Bottom Layer w10: DD7.20@2425,2475 2480.5,2419.5 v1(3387.5,2419.5) ; v1(3387.5,2567.5) v1(3544.5,2724.5) ; v1(3787.5,3243.5) v1(3915.5,3243.5) ; v1(3924.5,2601.5) 4462.65,2601.5 v1(4533.65,2530.5)
AVR_PROM: DD2.2 DD7.14 | length 2553.4
  Bottom Layer w10: DD7.14@2425,3075 2763.99,3075 2909.49,2929.5 3503.5,2929.5 3543.5,2969.5 3628.5,2969.5 3650.5,2991.5 3650.5,3048.5 3671.5,3069.5 3729.5,3069.5 3736.84,3062.15 4032.51,3062.15 4043.17,3051.5 4043.17,3007.99 4170.91,2880.24 4627.24,2880.24 4647.24,2860.24 4664.76,2860.24 DD2.2@4700,2825
AVR_RST: DD7.9 R19.2 X7.5 | length 432.8
  Bottom Layer w10: X7.5@2075,3775 2196.88,3653.12 2221.88,3653.12 R19.2@2300,3575 DD7.9@2425,3575
AVR_TRDOS: DD2.77 DD7.15 | length 3925.5
  Bottom Layer w10: DD7.15@2425,2975 2338.5,2888.5 2338.5,2282.5 2467.75,2153.24 3972.55,2153.24 4006.29,2119.5 4153.19,2119.5 4186.93,2153.24 4335.75,2153.24 4400.24,2088.75 4621.5,2088.75 4631.5,2098.75 4631.5,2138.75 4589.75,2180.5 4466.5,2180.5 4455.5,2191.5 4455.5,2353 4471.5,2369 4733.5,2369 4758.5,2394 4758.5,2425 DD2.77@4800,2425
AVR_WAIT: DD2.15 DD7.4 | length 2823
  Bottom Layer w10: DD7.4@2425,4075 2779.5,3720.5 3148.5,3720.5 3286.69,3582.3 4446.18,3582.3 4461,3597.12 4696.87,3597.12 4731.5,3562.5 4731.5,3540.5 4645,3454 4645,3370 DD2.15@4600,3325
AY_BC: DD2.81 DD9.29 | length 5797.8
  Bottom Layer w10: DD9.29@1850,975 1662.5,1162.5 1662.5,1380.5 1711.5,1429.5 2231.5,1429.5 2431.5,1629.5 3398.5,1629.5 3470.5,1701.5 3470.5,1881.5 3591.5,2002.5 3834.5,2002.5 3867.5,1969.5 4153.5,1969.5 4232.75,2048.75 4700.5,2048.75 5191.5,2539.75 5523.75,2539.75 5535.5,2551.5 5535.5,2625.5 5518.5,2642.5 4930.5,2642.5 4913,2625 DD2.81@4800,2625
AY_BDIR: DD2.80 DD9.27 | length 4742.7
  Top Layer w10: DD9.27@1850,775 1964,775 2020.5,831.5 2020.5,884.5 2234.5,1098.5 2234.5,1618.75 2210.75,1642.5 2210.75,2491.75 v1(2369.5,2650.5)
  Bottom Layer w10: v1(2369.5,2650.5) 2369.5,2551.5 2391.5,2529.5 3393.18,2529.5 3544.18,2680.5 3746.21,2680.5 3787.47,2639.24 4465.75,2639.24 4544.5,2560.5 4664.5,2560.5 DD2.80@4700,2525
AY_CLK: DD2.79 DD9.22 | length 5472.5
  Top Layer w10: v1(4785,133.24) 4833.5,181.75 4833.5,1693.99 4823.75,1703.75 4823.75,1925.24 4844.5,1945.99 4844.5,2480.5 DD2.79@4800,2525
  Bottom Layer w10: DD9.22@1850,275 2154.99,275 2339.99,90 4647.1,90 4675.25,118.15 4769.9,118.15 v1(4785,133.24)
B: DD2.33 R10.1 | length 4243.2
  Top Layer w10: R10.1@700,2050 654.5,2004.5 654.5,1891.5 666.5,1879.5 991.5,1879.5 1046.5,1934.5 1046.5,2775.5 v1(1125.5,2854.5)
  Bottom Layer w10: v1(1125.5,2854.5) 1460.5,2854.5 1489.5,2825.5 1690.5,2825.5 1785,2920 1942,2920 2347,3325 DD2.33@3600,3325
BB: DD2.28 R7.1 | length 4963.3
  Top Layer w10: R7.1@700,1925 920.5,2145.5 v1(920.5,3379.41)
  Bottom Layer w10: v1(920.5,3379.41) 1261.08,3720 2101.5,3720 2182,3639.5 2182,3578.99 2231.5,3529.5 2532.5,3529.5 2632.5,3629.5 3119.5,3629.5 3210.75,3538.24 3883.25,3538.24 3900,3521.5 DD2.28@3900,3425
BG: DD2.27 R6.1 | length 4612
  Top Layer w10: v1(3966.5,2110.5) 4055.5,2199.5 4055.5,2495.5 3976.81,2574.19 3976.81,3301.81 DD2.27@4000,3325
  Bottom Layer w10: R6.1@700,2175 1986.36,2175 2081.36,2080 2536.5,2080 2566.99,2110.5 v1(3966.5,2110.5)
BR: DD2.29 R5.1 | length 6476.6
  Top Layer w10: R5.1@700,2450 748.5,2498.5 v1(748.5,4096.5) ; v1(3868.5,3507.5) v1(3868.5,3694.5)
  Bottom Layer w10: v1(748.5,4096.5) 1192,4540 2029.99,4540 2345.5,4224.5 2495.5,4224.5 2591.5,4320.5 3051.5,4320.5 3070.5,4301.5 3070.5,4251.5 3042.5,4223.5 2914.5,4223.5 2818.49,4127.49 2818.49,3871.5 2869.98,3820 3742.99,3820 v1(3868.5,3694.5) ; v1(3868.5,3507.5) 3855.5,3494.5 3855.5,3369.5 DD2.29@3900,3325
BUSRQ: DD1.25 R21.2 | length 100
  Bottom Layer w10: DD1.25@6225,2875 R21.2@6325,2875
CLK: DD2.83 DD7.13 DD11.6 | length 4507.6
  Top Layer w10: v1(4596.5,2849.5) 4596.5,3048.5 4623.5,3075.5 4726.5,3075.5 4750.5,3051.5 4750.5,2995.5 4771.5,2974.5 4832.5,2974.5 4885.5,2921.5 4885.5,2810.5 DD2.83@4800,2725
  Bottom Layer w10: DD11.6@1550,2575 1700.5,2725.5 1975.5,2725.5 2379.5,3129.5 ; v1(4596.5,2849.5) 4155.24,2849.5 4135.24,2869.5 3481.5,2869.5 3414.14,2862.28 3281.35,2729.5 2883,2729.5 2587,3025.5 2405.5,3025.5 2379.5,3051.5 2379.5,3129.5 ; 2379.5,3129.5 DD7.13@2425,3175 2379.5,3129.5
CLK_CPU: DD1.6 DD2.22 R24.2 | length 1996.2
  Top Layer w10: DD2.22@4200,3425 4200,3549.99 4179.5,3570.5 4179.5,3753.5 4201.5,3775.5 4251.5,3775.5 4274.5,3798.5 4274.5,3850.5 v1(4459.5,4035.5)
  Bottom Layer w10: v1(4459.5,4035.5) 5110.5,4035.5 5270.99,3875 R24.2@5500,3875 DD1.6@5625,3875
D0: DD1.14 DD3.13 DD7.40 DD8.13 DD9.37 DD10.7 | length 16666.4
  Top Layer w10: v1(2241.5,1677.81) 2324.5,1594.81 ; DD8.13@2450,475 2324.5,600.5 ; v1(2875.5,4435.5) v1(2998.5,4558.5) ; DD7.40@3025,4375 2808.75,4158.75 2808.75,2948.75 2480.5,2620.5 2384.5,2620.5 2324.5,2560.5 2324.5,1594.81 ; DD10.7@5275,475 5327.84,475 5427.75,574.9 5427.75,3156.25 5591.5,3320 5651.99,3320 5670.5,3301.5 5670.5,3120.5 DD1.14@5625,3075 ; v1(5868.5,3045.5) 5868.5,4029.5 v1(6064.5,4225.5) ; 2324.5,600.5 2324.5,1594.81 ; 2324.5,600.5 2324.5,1594.81
  Bottom Layer w10: DD9.37@1850,1775 2144.31,1775 v1(2241.5,1677.81) ; DD8.13@2450,475 2851.45,475 2905.94,529.5 3795.5,529.5 DD3.13@3850,475 ; v1(2875.5,4435.5) 2964.5,4435.5 DD7.40@3025,4375 ; v1(2998.5,4558.5) 6431.5,4558.5 6476.5,4513.5 6476.5,4262.5 6439.5,4225.5 v1(6064.5,4225.5) ; DD1.14@5625,3075 5838.99,3075 v1(5868.5,3045.5)
D1: DD1.15 DD3.14 DD7.39 DD8.14 DD9.36 DD10.8 | length 13397.6
  Top Layer w10: v1(1705.5,1819.5) v1(1705.5,4314.5) ; v1(1724.5,1549.5) 1724.5,142.92 1825.92,41.5 2400.5,41.5 2495,136 2495,196.99 2471.5,220.5 2431.5,220.5 2404.5,247.5 2404.5,329.5 DD8.14@2450,375 ; DD10.8@5275,375 5226.5,326.5 5226.5,254.5 5251.5,229.5 5336.09,229.5 5435.59,130 5598.5,130 5640,171.5 5640,540 5620,560 5620,825.88 5551.5,830 5530,851.5 5530,1104 5571.24,1145.24 5571.24,2921.24 DD1.15@5625,2975
  Bottom Layer w10: v1(1705.5,1819.5) DD9.36@1850,1675 v1(1724.5,1549.5) ; v1(1705.5,4314.5) 1890.5,4129.5 2551.5,4129.5 2697,4275 DD7.39@3025,4275 ; DD8.14@2450,375 2485,340 2504.04,340 2518.54,325.5 3800.5,325.5 DD3.14@3850,375 3919.5,305.5 4404.5,305.5 4428.5,329.5 5014.5,329.5 5034.25,309.75 5209.75,309.75 DD10.8@5275,375
D2: DD1.12 DD3.15 DD7.38 DD8.15 DD9.35 DD10.9 | length 13832.9
  Top Layer w10: v1(2265.5,1554.5) 2265.5,562.5 2407.99,420 2471.5,420 2495,396.5 2495,351.5 2450,306.5 DD8.15@2450,275 ; v1(2510.5,1853.75) 2510.5,2550.91 2868.75,2909.16 2868.75,3120.5 2914.5,3166.24 2914.5,3868 2921.24,3874.75 2921.24,4071.24 DD7.38@3025,4175 ; v1(3358.5,4359.49) v1(3529.5,4188.5) ; DD10.9@5275,275 5447.75,447.75 5447.75,841.55 5450,843.81 5450,3100 DD1.12@5625,3275 ; v1(5976.5,3317.5) 5976.5,4087.5 v1(6020.5,4131.5)
  Bottom Layer w10: DD9.35@1850,1575 1896.5,1528.5 2223.5,1528.5 ; v1(2265.5,1554.5) 2249.5,1554.5 ; DD8.15@2450,275 2497.5,227.5 3802.5,227.5 DD3.15@3850,275 ; v1(2510.5,1853.75) 2392.5,1735.75 2392.5,1697.5 2257.5,1562.5 2249.5,1554.5 ; DD7.38@3025,4175 3209.49,4359.49 v1(3358.5,4359.49) ; v1(3529.5,4188.5) 3561.5,4220.5 5931.5,4220.5 v1(6020.5,4131.5) ; DD1.12@5625,3275 5934,3275 v1(5976.5,3317.5) ; 2223.5,1528.5 2249.5,1554.5 ; 2223.5,1528.5 2249.5,1554.5
D3: DD1.8 DD3.17 DD7.37 DD8.17 DD9.34 DD10.6 | length 12308.7
  Top Layer w10: DD9.34@1850,1475 1804.5,1429.5 1804.5,869.5 1784.5,849.5 1784.5,471.5 1826.5,429.5 1895.5,429.5 v1(1999.5,325.5) ; v1(2455.5,1904.5) 2490.5,1939.5 2490.5,2568.21 2848.75,2926.46 2848.75,3131.5 2892.5,3175.24 2892.5,3894.5 2901.24,3903.24 2901.24,4121.24 3000.5,4220.5 3051.5,4220.5 3070.5,4201.5 3070.5,4120.5 DD7.37@3025,4075 ; DD8.17@3050,175 3175,50 4325,50 DD3.17@4450,175 4511,236 4531.5,236 4543.24,247.75 4543.24,305.5 4528.5,320.24 v1(4528.5,529.5) ; DD10.6@5275,575 5320,620 5320,672.88 5360,712.88 5360,875 5340,895 5340,2897.38 5359.5,2916.88 5359.5,3444.79 5589.71,3675 DD1.8@5625,3675
  Bottom Layer w10: DD9.34@1850,1475 1805,1520 1805,1599 1835.5,1629.5 1873.5,1629.5 1895.5,1651.5 1895.5,1705.5 1871.5,1729.5 1827,1729.5 1805,1751.5 1805,1803 1831.5,1829.5 2380.5,1829.5 v1(2455.5,1904.5) ; v1(1999.5,325.5) 2271.5,325.5 2367.5,229.5 2460.5,229.5 2514.99,175 DD8.17@3050,175 ; v1(4528.5,529.5) 5229.5,529.5 DD10.6@5275,575
D4: DD1.7 DD3.18 DD7.36 DD8.18 DD9.33 DD10.5 | length 16746.2
  Top Layer w10: v1(1693.5,425.5) v1(1693.5,1218.5) ; v1(1693.5,1320.5) 1693.5,1654.5 1739.5,1700.5 1739.5,4415.5 1922.5,4598.5 3082.5,4598.5 v1(3263.5,4417.5) ; DD8.18@3050,275 3004.5,320.5 3004.5,502.5 3022.5,520.5 3146.5,520.5 3283.1,383.89 3283.1,153.4 3346.5,90 3935,90 4366.5,521.5 4471.5,521.5 4495.5,497.5 4495.5,320.5 DD3.18@4450,275 ; DD10.5@5275,675 5340,740 5340,855 5320,875 5320,2924.75 5339.5,2944.24 5339.5,3489.5 DD1.7@5625,3775
  Bottom Layer w10: v1(1693.5,425.5) 2295.5,425.5 2400.99,320 2495.5,320 2540.5,275 DD8.18@3050,275 ; v1(1693.5,1218.5) 1795.5,1320.5 ; v1(1693.5,1320.5) 1795.5,1320.5 ; v1(3263.5,4417.5) 3384.5,4417.5 3409.5,4392.5 3409.5,4338.5 3282.42,4211.42 3180.63,4211.42 3089.71,4120.5 2991.5,4120.5 2979.5,4108.5 2979.5,4020.5 DD7.36@3025,3975 3098.76,3975 3119.5,3995.75 3552.24,3995.75 3561.24,4004.75 5101.24,4004.75 5330.99,3775 DD1.7@5625,3775 ; 1795.5,1320.5 DD9.33@1850,1375 1795.5,1320.5
D5: DD1.9 DD3.19 DD7.35 DD8.19 DD9.32 DD10.4 | length 11828.2
  Top Layer w10: v1(2866.5,551.5) 2871.5,546.5 v1(2871.5,375) ; v1(5105,360.5) 5085,380.5 5085,420.5 5085,570.24 ; v1(5105,420.5) 5105,550.24 5085,570.24 ; DD10.4@5275,775 5125.5,924.5 5067.5,924.5 ; DD1.9@5625,3575 5670.5,3620.5 5670.5,3801.5 5651.5,3820.5 5334.5,3820.5 5229.5,3715.5 5229.5,1817.99 5264.25,1783.24 5264.25,1625.5 5174.96,1536.21 5174.96,1031.96 5067.5,924.5 ; 5054.5,911.5 5067.04,924.04 ; 5054.5,911.5 5067.04,924.04 ; 5054.5,911.5 5054.5,851.5 5065.5,840.5 5065.5,589.75 ; 5065.5,589.75 5085,570.24 ; 5065.5,589.75 5085,570.24 ; 5067.04,924.04 5067.5,924.04 5067.5,924.5 ; 5067.04,924.04 5067.5,924.5
  Bottom Layer w10: DD9.32@1850,1275 2170.5,954.5 2170.5,709.5 2350.5,529.5 2844.5,529.5 v1(2866.5,551.5) ; v1(2871.5,375) DD8.19@3050,375 3095.5,420.5 3887,420.5 3897.75,431.24 3978.67,431.24 4034.92,375 DD3.19@4450,375 4624.5,375 4669.99,420.5 ; DD7.35@3025,3875 3772.99,3875 3877.99,3770 4476.66,3770 4567.89,3678.77 5521.23,3678.77 DD1.9@5625,3575 ; v1(5105,360.5) 5045,420.5 ; v1(5105,420.5) 5045,420.5 ; 4669.99,420.5 5045,420.5 ; 4669.99,420.5 5045,420.5
D6: DD1.10 DD3.20 DD7.34 DD8.20 DD9.31 DD10.3 | length 14011.2
  Top Layer w10: DD7.34@3025,3775 2993.71,3743.71 2969.71,3743.71 2957.5,3731.5 2957.5,2645.5 2873.5,2561.5 2873.5,738.99 2957.5,654.99 2957.5,271.5 2999.5,229.5 3073.5,229.5 3095.5,251.5 3095.5,429.5 ; DD3.20@4450,475 4045,70 3299.49,70 3257.99,111.5 3257.99,267.01 3095.5,429.5 ; DD10.3@5275,875 5320,830 5320,750.5 5295,725.5 5259.5,725.5 5184.99,650.99 5184.99,600 5259.5,525.5 5332.13,525.5 5404.5,597.86 5404.5,3254.5 DD1.10@5625,3475 ; 3095.5,429.5 DD8.20@3050,475 3095.5,429.5
  Bottom Layer w10: DD9.31@1850,1175 1805,1130 1805,1051.5 1830,1026.5 1890.5,1026.5 2066.5,850.5 2115.5,850.5 2146.09,819.9 2146.09,612.9 2329.5,429.5 3004.5,429.5 DD8.20@3050,475 ; DD7.34@3025,3775 3427.99,3775 3544.22,3658.77 4375.69,3658.77 4395.17,3678.24 4456.66,3678.24 4476.14,3658.77 5441.23,3658.77 5504.52,3595.48 5535.57,3595.48 5625,3506.05 DD1.10@5625,3475
D7: DD1.13 DD3.21 DD7.33 DD8.21 DD9.30 DD10.2 | length 11903.7
  Top Layer w10: DD7.33@3025,3675 3128.5,3571.5 3128.5,3105.5 3235.5,2998.5 3235.5,760.5 DD8.21@3050,575 ; v1(5116.5,640.5) 5156.5,680.5 v1(5156.5,787.5) ; DD10.2@5275,975 5229.5,1020.5 5229.5,1538 5299.5,1608 v1(5299.5,2955.5)
  Bottom Layer w10: DD9.30@1850,1075 1895,1120 1895,1199.99 1869.5,1225.5 1823.5,1225.5 1805,1243.99 1805,1301 1824.5,1320.5 2151.5,1320.5 2199.5,1272.5 2199.5,847.5 2421.5,625.5 2830.5,625.5 2873.95,582.04 2904.03,575 DD8.21@3050,575 3282.5,575 3336.99,629.5 3513.5,629.5 3604.5,720.5 3668.78,720.5 3748.78,640.49 3786,640.49 3806,620.5 4235.5,620.5 4280.99,575 DD3.21@4450,575 4631.5,575 4676.99,620.5 5096.5,620.5 v1(5116.5,640.5) ; v1(5156.5,787.5) 5115.5,828.5 4977.5,828.5 4954.5,851.5 4954.5,911.5 4969.5,926.5 5045.5,926.5 5094,975 DD10.2@5275,975 ; v1(5299.5,2955.5) 5364,3020 5837.51,3020 5873.01,2984.5 6102.5,2984.5 6129.5,3011.5 6129.5,3055.57 6010.07,3175 DD1.13@5625,3175
G: DD2.34 R9.1 | length 6279
  Top Layer w10: R9.1@700,2325 779.5,2404.5 779.5,4583.5 868.5,4672.5 3158.31,4672.5 3656,4174.8 3656,3405.5 3700,3361.5 DD2.34@3700,3325